# Altium PCB remote-38k-6key.PcbDoc
Units mm, origin at the board's own origin, x right, y up, seen from the top; angles counter-clockwise.
Board outline 151 x 86.38 mm, 2 copper layers (Top Layer, Bottom Layer); 20 components, 16 nets, 58 pads, 0 vias.
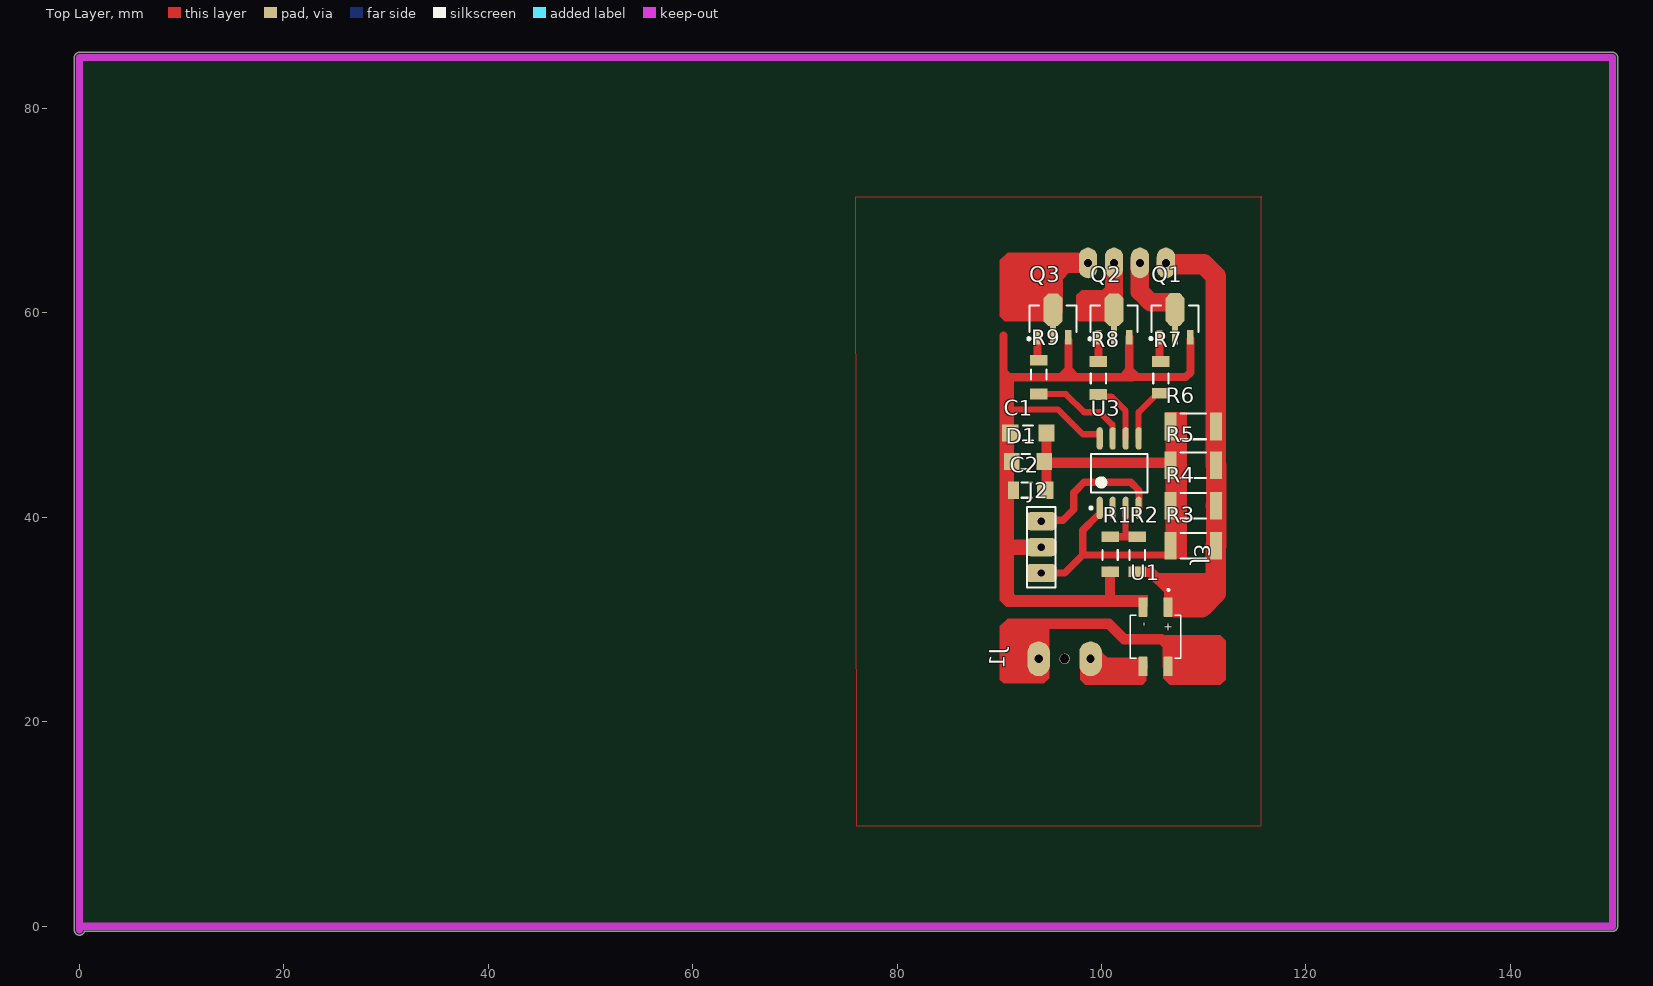
[diagram p0: Top Layer view]
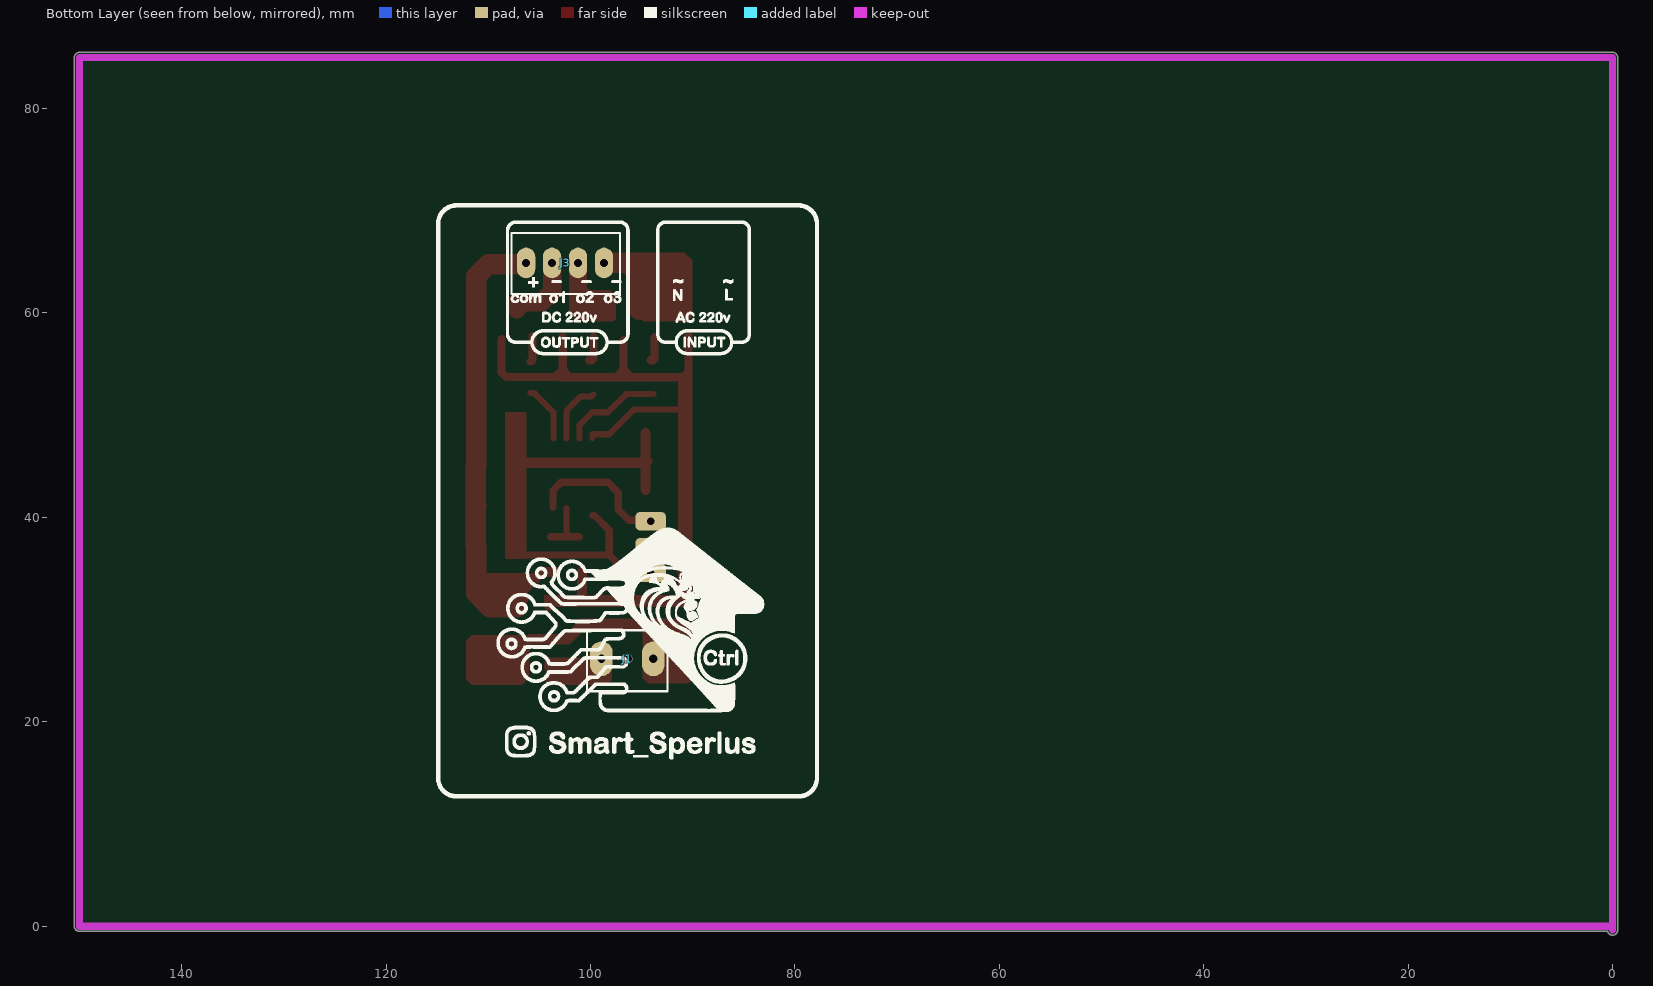
[diagram p1: Bottom Layer view, seen from below]
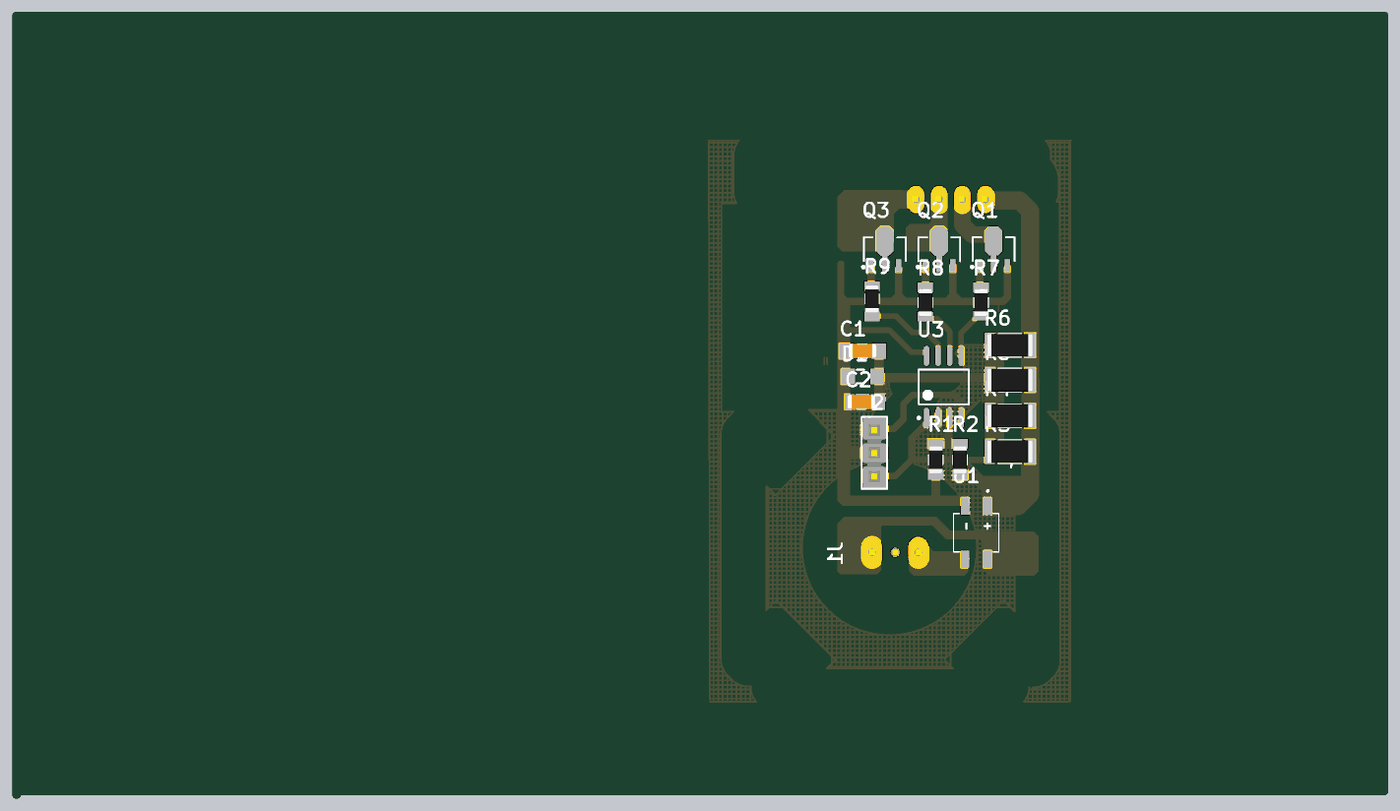
[diagram p2: 3D render of the assembled board from above, using the file's embedded part models]

## Layer stack, top to bottom
Top Solder: solder mask 0.0102, Solder Resist, Dk 3.5
Top Layer: signal copper 0.0356
Dielectric 1: dielectric 0.32, FR-4, Dk 4.8
Bottom Layer: signal copper 0.0356
Bottom Solder: solder mask 0.0102, Solder Resist, Dk 3.5

## Board outline
-0.5,-0.381 -0.5,85 cw(c0,85) 0,85.5 150,85.5 cw(c150,85) 150.5,85 150.5,0 cw(c150,0) 150,-0.5 0.486,-0.5 cw(c0,-0.381)

## Design rules (kind name [scope] priority, off if disabled: settings)
Clearance Clearance_1 [InPolygon] p1: gap=1 ignorepadtopadclearanceinfootprint=FALSE
Clearance [All] p2: gap=0.6 ignorepadtopadclearanceinfootprint=FALSE
PolygonConnect [All] p1: connectstyle=Relief reliefconductorwidth=0.254 reliefentries=4 polygonreliefangle="90 Angle" airgapwidth=0.254
RoomDefinition remote-38k-6key [InComponentClass('remote-38k-6key')] p1: confinementstyle=ConfineIn formatcopy=TRUE lockcomponents=FALSE outline 144.907,-4.953 247.904,-4.953 247.904,23.114 144.907,23.114
RoutingLayers [All] p1: top layer_v5=FALSE bottom layer_v5=TRUE
RoutingVias [All] p1: holewidth=0.711 width=2.5 viastyle="Through Hole" minholewidth=0.711 minwidth=1.27 maxholewidth=0.711 maxwidth=2
SolderMaskExpansion [All] p1: expansion=0.102 istentingtop=FALSE
Width [All] p1: maxlimit=3 minlimit=0.5 preferedwidth=1
29 further rules are at their usual default settings.

## Components (designator, comment, footprint, x,y, rotation, side; value= is the part's Value field where it differs from the comment)
C1 "=Value" "CAP 1206"#1 92.837,48.26 r180 top
C2 "=Value" "CAP 1206"#2 92.71,42.672 r180 top
D1 "Diode" C1206 92.583,45.466 r0 top
J1 "Header3X1" "HEADER 3X1"#1 93.853,26.162 r0 bottom
J2 "Header3X1" "HEADER 3X1"#2 94.107,39.624 r270 top
J3 "Header4X1" "HEADER 4X1" 106.299,64.897 r180 bottom
Q1 "Triac" SOT89N 107.188,59.436 r90 top
Q2 "Triac" SOT89N 101.219,59.425 r90 top
Q3 "Triac" SOT89N 95.25,59.425 r90 top
R1 "10K" "RES 1206 (3216X08L)"#1 100.838,36.322 r270 top
R2 "10K" "RES 1206 (3216X08L)"#2 103.505,36.322 r90 top
R3 "10K" "RES 2010 (5026X08L)" 108.966,37.211 r180 top
R4 "10K" "RES 2010 (5026X08L)" 108.966,41.148 r180 top
R5 "10K" "RES 2010 (5026X08L)" 108.966,45.085 r180 top
R6 "10K" "RES 2010 (5026X08L)" 108.966,48.895 r180 top
R7 "10K" "RES 1206 (3216X08L)"#3 105.813,53.594 r90 top
R8 "10K" "RES 1206 (3216X08L)"#4 99.695,53.594 r90 top
R9 "10K" "RES 1206 (3216X08L)"#5 93.853,53.975 r90 top
U1 "MB6S" SOIC245P670X270-4N 105.283,28.321 r270 top
U3 "ATtiny15L-1SC" 8S2_N 101.727,44.323 r90 top

## Footprints (in the part's own frame and the unit in brackets; to place one, negate y for a bottom-side part, rotate by r counter-clockwise, add the part's x,y. Pads: shape width x height; smd on the part's side, far side on the other; paste and mask are expansions set on the pad)
8S2_N [mm] "SOP, 8-Leads, Body 5.3x5.3mm, Pitch 1.27mm, IPC Medium Density"
  oval 2.2x0.6 smd: 1(-3.4,1.905) 2(-3.4,0.635) 3(-3.4,-0.635) 4(-3.4,-1.905) 5(3.4,-1.905) 6(3.4,-0.635) 7(3.4,0.635) 8(3.4,1.905)
  silkscreen extent -3.52,-2.75 1.9,2.88, body extent -2.73,-2.75 2.73,2.75, height 2.16
C1206 [mm] "Chip Capacitor, Body 3.2x1.6mm, IPC High Density"
  rect 1.5x1.7 smd: 1(-1.35,0) 2(1.83,0)
  silkscreen extent -0.4,-0.75 0.4,0.75, body extent -1.7,-0.9 1.7,0.9, height 1.3
"CAP 1206"#1 [mm]
  rect 1.6x1.7 smd: 1(-1.778,0) 2(1.778,0)
  silkscreen extent -0.47,-0.75 0.53,0.75, body extent -1.49,-0.77 1.55,0.75, height 0.75
"CAP 1206"#2 [mm]
  rect 1.6x1.7 smd: 1(-1.778,0)
  rect 1.05x1.7 smd: 2(1.326,0)
  silkscreen extent -0.47,-0.75 0.53,0.75, body extent -1.49,-0.77 1.55,0.75, height 0.75
"HEADER 3X1"#1 [mm]
  oval 2.2x3.4 hole 0.8: 1(0,0) 3(5.08,0)
  round 1 hole 0.9: 2(2.54,0)
  silkscreen extent -1.4,-2.79 6.48,3.17, body extent -1.24,-1.27 6.38,1.27, height 8.38
"HEADER 3X1"#2 [mm]
  rrect50% 1.778x3 hole 0.7: 1(0,0) 2(2.54,0) 3(5.08,0)
  silkscreen extent -1.4,-1.4 6.48,1.4, body extent -1.24,-1.27 6.38,1.27, height 8.38
"HEADER 4X1" [mm]
  oval 1.8x3 hole 0.8: 1(0,0) 2(2.54,0) 3(5.08,0) 4(7.62,0)
  silkscreen extent -1.43,-3.05 9.18,2.92, body extent -1.19,-1.22 8.97,1.32, height 8.38
"RES 1206 (3216X08L)"#1 [mm] "Chip Resistor, 2-Leads, Body 3.2x1.6mm, IPC High Density _ (0.125 W)"
  rect 1.05x1.7 smd: 1(-1.778,0) 2(1.651,0)
  silkscreen extent -0.5,-0.75 0.5,0.75, body extent -1.52,-0.76 1.53,0.76, height 0.6
"RES 1206 (3216X08L)"#2 [mm] "Chip Resistor, 2-Leads, Body 3.2x1.6mm, IPC High Density _ (0.125 W)"
  rect 1.05x1.7 smd: 1(-1.651,0) 2(1.778,0)
  silkscreen extent -0.5,-0.75 0.5,0.75, body extent -1.52,-0.76 1.53,0.76, height 0.6
"RES 1206 (3216X08L)"#3 [mm] "Chip Resistor, 2-Leads, Body 3.2x1.6mm, IPC High Density _ (0.125 W)"
  rect 1.05x1.7 smd: 1(-1.44,0) 2(1.651,0)
  silkscreen extent -0.5,-0.75 0.5,0.75, body extent -1.52,-0.76 1.53,0.76, height 0.6
"RES 1206 (3216X08L)"#4 [mm] "Chip Resistor, 2-Leads, Body 3.2x1.6mm, IPC High Density _ (0.125 W)"
  rect 1.05x1.7 smd: 1(-1.567,0) 2(1.651,0)
  silkscreen extent -0.5,-0.75 0.5,0.75, body extent -1.52,-0.76 1.53,0.76, height 0.6
"RES 1206 (3216X08L)"#5 [mm] "Chip Resistor, 2-Leads, Body 3.2x1.6mm, IPC High Density _ (0.125 W)"
  rect 1.05x1.7 smd: 1(-1.905,0) 2(1.397,0)
  silkscreen extent -0.5,-0.75 0.5,0.75, body extent -1.52,-0.76 1.53,0.76, height 0.6
"RES 2010 (5026X08L)" [mm] "Chip Resistor, 2-Leads, Body 5.0x2.6mm, IPC High Density _ (0.250 W)"
  rect 1.15x2.7 smd: 1(-2.225,0) 2(2.225,0)
  silkscreen extent -1.25,-1.25 1.25,1.25, body extent -2.54,-1.27 2.54,1.27, height 0.6
SOIC245P670X270-4N [mm]
  rrect23% 1.91x0.91 smd: 1(-2.9,1.225) 2(-2.9,-1.225) 3(2.9,-1.225) 4(2.9,1.225)
  silkscreen extent -4.68,-2.48 2.1,2.48
SOT89N [mm] "SOT89, 3-Leads, Body 4.5x2.4 mm, Pitch 1.5mm, Lead Span 4.1mm, IPC Medium Density"
  rect 1.4x0.6 smd: 1(-1.8,1.5) 3(-1.8,-1.5)
  rect 1.8x0.6 smd: 2(-1.6,0)
  oct 3.2x1.9 smd: 2(0.9,0)
  silkscreen extent -2.07,-2.3 1.3,2.47, body extent -1.3,-2.3 1.3,2.3, height 1.6

## Part data
C1 C2: library part Capacitor, "Capacitor"
D1: "Default Diode", Code_JEDEC=DO-214-AB, LatestRevisionDate=17-Jul-2002, LatestRevisionNote="Re-released for DXP Platform.", PackageDescription="DO-214-AB/SMC; 2 C-Bend Leads; Body 7.9 x 5.9 mm, inc. leads (LxW)", PackageReference=SMC, PackageVersion=Sep-1996, Published=8-Jun-2000, Publisher="Altium Limited"
Q1 Q2 Q3: "Silicon Bidirectional Triode Thyristor", ComponentLink1Description="Manufacturer Link", ComponentLink1URL=http://www.motorola.com/, DatasheetVersion=1999, LatestRevisionDate=17-Jul-2002, LatestRevisionNote="Re-released for DXP Platform.", Note="Pin 2 is electrically connected to Pin 4 (TAB)", PackageDescription="TO, Thru-Hole, Vertical, Heatsink Mounted; 3 In-Line Leads; Pitch 2.28 mm", PackageReference=369-03, Published=29-Sep-2000, Publisher="Altium Limited"
R1 R2 R3 R4 R5 R6 R7 R8 R9: library part Resistor, "Resistor", Power="1/4 W", Tolerance=5%
U1: "Bridge Rectifier Single Phase Standard 600V Surface Mount 4-SOIC", Package="BESOP-4 Surge Components", Digi-Key_Part_Number=MB6SCT-ND, Digi-Key_Purchase_URL=https://www.digikey.com.tr/product-detail/en/on-semiconductor/MB6S/MB6SCT-ND/965654?utm_source=snapeda&utm_medium=aggregator&utm_campaign=symbol, MF="ON Semiconductor", MP=MB6S, SnapEDA_Link=https://www.snapeda.com/parts/MB6S/ON%20Semiconductor/view-part/2774209/?ref=snap
U3: "8-Bit AVR Microcontroller with 1K Byte of Flash Memory", Supplier Part Number 1=ATTINY15L-1SC-ND, ComponentLink1Description=Datasheet, ComponentLink1URL=http://www.atmel.com/dyn/resources/prod_documents/doc1187.pdf, ComponentLink2Description="Atmel.com Home", ComponentLink2URL=http://www.atmel.com, DatasheetVersion=1187E-AVR-06/02, LatestRevisionDate=16-Oct-2006, LatestRevisionNote="IPC-7351 Footprint Added.", PackageDescription="8-Lead, 0.208\" Body, Plastic Small Outline Package (EIAJ)", PackageReference=8S2, PackageVersion="revF, Apr-2008", Published=17-Sep-2003, Publisher="Altium Limited", Supplier 1=Digi-Key, Supplier 2=Mouser, Supplier Part Number 2=556-ATTINY15L1SC

## Nets (pads, with @x,y where several pads share a name; then routed paths per layer and width w, separated by ;. In a path a pad name is that pad's centre, name@x,y a point inside that pad or via, vN(x,y) a via of type N, cw(c..) or ccw(c..) an arc to the next point about the centre after c; other vN are vias at no path point)
GND: C1.2 C2.2 D1.1 J2.2 Q1.3 Q2.3 Q3.3 R1.2 U1.2 U3.8 | length 84.1
  Top Layer w0.5: U3.8@99.776,48.133 99.822,48.087 U3.8
  Top Layer w0.6: 91.059,50.546 95.758,50.546 98.171,48.133 U3.8@99.776,48.133
  Top Layer w0.8: 90.424,57.785 90.424,54.229 91.059,53.594 ; Q3.3@96.774,57.325 96.774,54.185 97.243,53.716 ; Q2.3 102.719,53.716 ; 102.997,53.716 102.719,53.716 ; 102.997,53.72 108.243,53.72 108.712,54.189 Q1.3@108.712,57.452 ; U1.2 104.058,31.695 104.003,31.75 91.528,31.75 91.059,32.219 91.059,37.084 91.059,45.466 C1.2 91.059,50.546 91.059,53.594 ; 91.059,53.594 91.181,53.716 97.243,53.716 ; 97.243,53.716 101.59,53.716 102.719,53.716
  Top Layer w1: 100.838,32.131 R1.2
  Top Layer w1.5: 91.059,37.084 J2.2
ir-r: J2.1 U3.4 | length 14.1
  Top Layer w0.7: J2.1 94.198,39.715 96.23,39.715 97.282,40.767 97.282,42.418 98.298,43.434 102.87,43.434 103.682,42.622 U3.4@103.682,40.973
l1: R7.1 U3.5 | length 5.6
  Top Layer w0.6: U3.5 103.632,50.298 105.488,52.154 R7.1 R7.1@105.854,52.154
l2: R8.1 U3.6 | length 6
  Top Layer w0.6: R8.1 99.883,51.839 100.942,51.839 102.362,50.419 U3.6
l3: R9.1 U3.7 | length 9.8
  Top Layer w0.6: R9.1 96.52,52.07 98.298,50.292 99.846,50.292 101.073,49.065 101.073,47.742 U3.7
NetJ1_1: J1.1 U1.4 | length 18.5
  Top Layer w1: J1.1 93.853,28.702 94.742,29.591 100.711,29.591 102.235,28.067 105.877,28.067 106.463,27.481 106.463,25.466 U1.4
NetJ1_3: J1.3 U1.3 | length 5.6
  Top Layer w1: J1.3 99.314,25.781 104.013,25.781 104.013,25.466 U1.3
NetJ3_2: J3.2 Q1.2 | length 7.3
  Top Layer w1.8: J3.2 103.759,62.09 104.813,61.036 107.138,61.036 107.188,60.986 Q1.2@107.188,60.336
NetJ3_3: J3.3 Q2.2 | length 4.6
  Top Layer w1.8: Q2.2@101.219,60.325 J3.3
NetJ3_4: J3.4 Q3.2 | length 7.1
  Top Layer w2: Q3.2@95.25,60.325 95.25,63.726 96.422,64.898 J3.4@98.425,64.898
NetQ1_3: Q1.1 R7.2 | length 2.6
  Top Layer w0.8: Q1.1@105.688,57.752 105.688,55.37 R7.2 R7.2@105.854,55.245
NetQ2_3: Q2.1 R8.2 | length 2.6
  Top Layer w0.8: Q2.1 99.719,55.497 99.844,55.372 R8.2@100.132,55.372
NetQ3_3: Q3.1 R9.2 | length 2.5
  Top Layer w0.8: Q3.1 93.75,55.497 93.875,55.372 R9.2@94.114,55.372
vcc: C1.1 C2.1 D1.2 J2.3 R3.2 R4.2 R5.2 R6.2 U3.1 | length 48
  Top Layer w0.7: J2.3@93.284,34.544 J2.3 96.393,34.544 98.171,36.322 ; U3.1@99.772,40.173 99.609,40.173 98.171,38.735 98.171,36.322 ; R3.2 106.741,36.547 106.516,36.322 98.171,36.322
  Top Layer w1: D1.2 94.615,45.668 C1.1 ; C2.1@94.615,42.672 94.615,45.339 106.666,45.339 R5.2@106.741,45.264 ; R3.2 R4.2 R5.2@106.741,44.183 ; R5.2 R5.2@106.741,45.264 ; R6.2 R5.2@106.741,45.264
VDD: J3.1 R2.1 R3.1 R4.1 R5.1 R6.1 U1.1 | length 45.7
  Top Layer w1: R2.1 103.53,34.646 104.8,34.646 106.6,32.846 106.6,32.018 U1.1@106.553,31.971
  Top Layer w2: J3.1@106.399,64.77 110.019,64.77 111.191,63.598 R6.1 R5.1 111.219,45.057 111.219,41.176 R4.1 111.219,41.12 111.219,37.239 R3.1 111.191,32.578 109.834,31.221 107.188,31.221
zero: R1.1 R2.2 U3.3 | length 5.6
  Top Layer w0.6: 102.362,38.1 U3.3
  Top Layer w0.7: R1.1@101.092,38.1 102.362,38.1 R2.2@103.907,38.1
pads on no net: J1.2 U3.2

## Polygon pours and split planes (outlines as drawn)
GND on Top Layer "NONET_L01_P024" (hatched 90Degree grid 0.5 track 0.2, shelved, pour order 24): 75.946,71.374 115.697,71.374 115.57,71.247 115.57,9.779 76.073,9.779

## Keep-outs
Keep-Out Layer:
  lines w0.7: 0,-0.381 0,85 150,85 150,0 0,0

## Other copper
Top Layer:
  region net NetJ1_3: 99.949,26.924 100.965,25.908 104.394,25.908 104.394,24.003 104.013,23.622 98.425,23.622 97.917,24.13 97.917,26.289
  region net NetJ1_1: 105.029,28.448 111.633,28.448 112.141,27.94 112.141,24.13 111.633,23.622 106.68,23.622 106.045,24.257 106.045,27.432
  region net NetJ1_1: 95.377,30.099 90.805,30.099 90.043,29.337 90.043,24.13 90.424,23.749 94.361,23.749 94.869,24.257 94.869,29.083 94.996,29.21
  region net VDD: 105.537,34.544 110.744,34.544 110.871,34.417 110.617,34.163 110.617,32.258 110.49,32.258 109.474,31.242 106.934,31.242 106.934,32.512 106.6,32.846
  region net vcc: 106.299,50.292 108.331,50.292 108.331,36.068 108.204,35.941 106.299,35.941
  region net GND: 90.043,55.118 90.043,31.877 90.678,31.242 104.521,31.242 104.521,32.385 91.567,32.385 91.059,32.893 91.059,53.421
  region net GND: 97.028,54.737 97.79,53.975 97.79,53.721 95.885,53.721 95.885,54.102 96.52,54.737
  region net NetJ3_4: 97.282,65.913 90.805,65.913 90.043,65.151 90.043,59.69 90.551,59.182 94.869,59.182 94.869,62.738 95.504,63.373
  region net NetJ3_3: 100.711,62.865 100.076,62.23 98.044,62.23 97.536,61.722 97.536,59.436 97.79,59.182 101.346,59.182 101.473,59.309
  region net GND: 102.489,54.8 101.79,53.911 101.79,53.657 102.806,53.657 103.06,53.911 103.822,53.911 102.933,54.8

## Silkscreen, mask and mechanical layers (free items; w line width, h text height)
Bottom Overlay:
  drawing of 14186 lines, arcs and shapes, not listed
Bottom Solder:
  lines w0.2: 89.281,22.987 89.281,67.564 112.903,67.564 112.903,22.987 89.281,22.987

## Text inside footprints (layer, text, board x,y; h text height)
U1: Top Overlay "-" at 103.883,29.721 h0.81 r270; Top Overlay "+" at 106.173,29.72 h0.81 r270